# Allegro board SENSOR_TEST_BOARD.brd
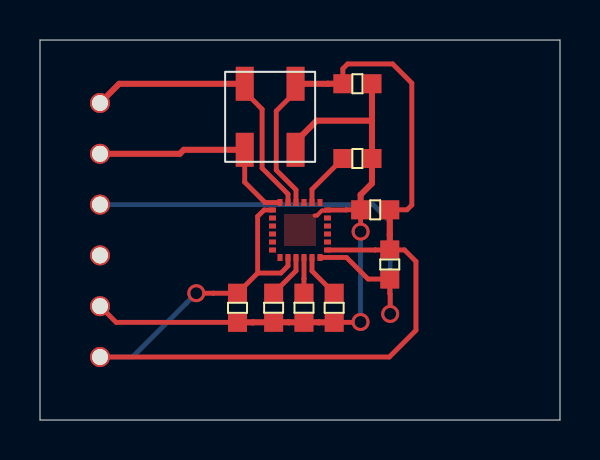
[diagram p0: board, top side]
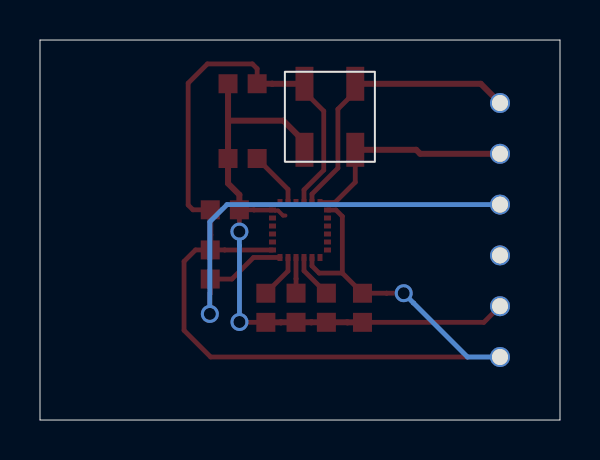
[diagram p1: board, bottom side, seen from below]

Outline 26 x 19 mm; copper layers: TOP, BOTTOM. Coordinates in mm from the lower left corner of the outline.
Outline path: 0,19 26,19 26,0 0,0 0,19

## Placement (name value [footprint] x y rotation side)
C1  0.1uF  [SMD_CAP_0603]  13.2 5.61 90 top
C2  0.1uF  [SMD_CAP_0603]  16.76 10.51 0 top
C3  10nF  [SMD_CAP_0603]  9.88 5.61 270 top
C4  0.1uF  [SMD_CAP_0603]  15.87 16.81 0 top
J1  CON6  [6PINHEADER]  3 9.5 90 top
R1  10k  [SMD_CAP_0603]  11.68 5.61 90 top
R2  10k  [SMD_CAP_0603]  17.49 7.78 270 top
R5  10k  [SMD_CAP_0603]  14.71 5.61 90 top
R6  10k  [SMD_CAP_0603]  15.87 13.07 0 top
U1  MPU-9250  [MPU_9250]  13 9.5 0 top
U2  MS5805  [MS5805ALTIMETER]  11.51 15.16 270 top

## Library data of the parts
C1-C4 = C
J1 = CON6
R1 R2 R5 R6 = R
U1 = MPU-9250_12
U2 = MS5805

## Footprints (pads in the part's own frame, mm; a bottom-side part is the same pattern mirrored in y, then rotated)
6PINHEADER
  round 1 hole 0.8: 1(-6.35,0) 2(-3.81,0) 3(-1.27,0) 4(1.27,0) 5(3.81,0) 6(6.35,0)
MPU_9250
  rect 0.35x0.25 smd: 1(-1.375,1) 2(-1.375,0.6) 3(-1.375,0.2) 4(-1.375,-0.2) 5(-1.375,-0.6) 6(-1.375,-1) 13(1.375,-1) 14(1.375,-0.6) 15(1.375,-0.2) 16(1.375,0.2) 17(1.375,0.6) 18(1.375,1)
  rect 0.25x0.35 smd: 7(-1,-1.375) 8(-0.6,-1.375) 9(-0.2,-1.375) 10(0.2,-1.375) 11(0.6,-1.375) 12(1,-1.375) 19(1,1.375) 20(0.6,1.375) 21(0.2,1.375) 22(-0.2,1.375) 23(-0.6,1.375) 24(-1,1.375)
MS5805ALTIMETER
  rect 1.7x0.9 smd: 1(-1.65,1.27) 2(-1.65,-1.27) 3(1.65,-1.27) 4(1.65,1.27)
SMD_CAP_0603
  rect 0.95x0.95 smd: 1(-0.728,0) 2(0.728,0)

## Nets
3.3V: C2.2 C3.1 C4.1 J1.1 R2.1 U1.1(VDDIO) U1.8(VDD_IO) U1.13(VDD) U1.22(NCS) U2.1(VDD)
GND: C1.1 C2.1 C3.2 C4.2 J1.2 R1.1 R5.1 R6.2 U1.18(GND) U2.4(VSS)
INT: J1.4 R2.2 U1.12(INT)
SCL: J1.6 U1.23(SCL/SCLK) U2.2(SCL)
SDA: J1.5 U1.24(SDA/SDI) U2.3(SDA)
N00220: C1.2 U1.10(REG_OUT)
N00540: R1.2 U1.9(AD0/SDO)
N00816: R5.2 U1.11(FSYNC)
N04249: R6.1 U1.20(RESV/GND)

Pads without a net: J1 3; U1 2 3 4 5 6 7 14 15 16 17 19 21

## Via types
v1: diameter 0.9, hole 0.6, TOP to BOTTOM, 4 vias

## Routing (per net, layer and track width the routed paths; a pad name or vN(x,y) marks a point on that pad's centre or on a via; arc(x,y) is an arc through that point)
3.3V: length 63
  TOP w0.24: C4.1 15.14,17.56 15.38,17.8 17.63,17.8 18.59,16.84 18.59,10.75 18.35,10.51 C2.2 ; 10.88,7.35 C3.1 8.67,6.34 8.67,6.34 v1(7.81,6.34) ; 10.88,7.35 12.04,7.35 12.4,7.7 U1.8 ; 10.88,7.35 10.88,10.18 11.2,10.5 U1.1 ; U1.22 12.8,11.51 11.81,12.5 11.81,15.45 12.78,16.41 U2.1 ; J1.1 17.47,3.15 18.8,4.48 18.8,7.93 18.22,8.5 R2.1 16.77,8.5 16.76,8.5 U1.13
  TOP w0.3: C4.1 14.39,16.81 14.39,16.81 U2.1 ; R2.1 17.49,9.26 17.49,9.26 C2.2
  BOTTOM w0.24: v1(7.81,6.34) 7.32,5.85 4.62,3.15 J1.1
GND: length 32.6
  TOP w0.2: 13.73,10.22 13.85,10.22 14.1,10.47 14.25,10.47 14.27,10.5 U1.18
  TOP w0.24: J1.2 3.81,4.88 C3.2 ; v1(16.03,4.9) 16.01,4.88 R5.1 ; U1.18 15.3,10.5 15.31,10.51 C2.1 v1(16.03,9.42)
  TOP w0.3: C2.1 16.03,11.26 16.6,11.83 R6.2 16.6,13.83 16.6,14.91 ; 16.6,14.91 16.54,14.97 13.83,14.97 12.78,13.91 U2.4 ; 16.6,14.91 C4.2 ; C3.2 10.63,4.88 10.63,4.89 R1.1 12.43,4.89 C1.1 13.95,4.89 13.95,4.88 R5.1
  BOTTOM w0.24: v1(16.03,4.9) 16.03,8.72 16.03,8.72 v1(16.03,9.42)
INT: length 25.2
  TOP w0.24: U1.12 15.33,8.13 16.4,7.05 R2.2 17.49,6.33 17.51,6.31 v1(17.51,5.3)
  BOTTOM w0.24: J1.4 16.65,10.77 17.51,9.91 v1(17.51,5.3)
SCL: length 14.5
  TOP w0.24: U2.2 10.24,16.41 11.1,15.54 11.1,12.59 12.4,11.3 U1.23
  TOP w0.3: J1.6 3.96,16.81 U2.2
SDA: length 11.1
  TOP w0.24: U2.3 10.24,11.89 11.25,10.87 U1.24
  TOP w0.3: U2.3 7.19,13.51 6.99,13.31 J1.5
N00220: length 1.8
  TOP w0.24: C1.2 13.2,7.06 13.2,7.07 U1.10
N00540: length 2.2
  TOP w0.24: R1.2 12.8,7.46 U1.9
N00816: length 2.2
  TOP w0.24: U1.11 13.6,7.45 R5.2
N04249: length 2.8
  TOP w0.24: R6.1 13.6,11.53 U1.20

## Copper pours and planes (outline as drawn; the poured copper is in the pictures)
GND on TOP: 13.8,10.3 13.8,8.7 12.2,8.7 12.2,10.3
